# EAGLE board powerSwitch005-pan (EAGLE 5.10)
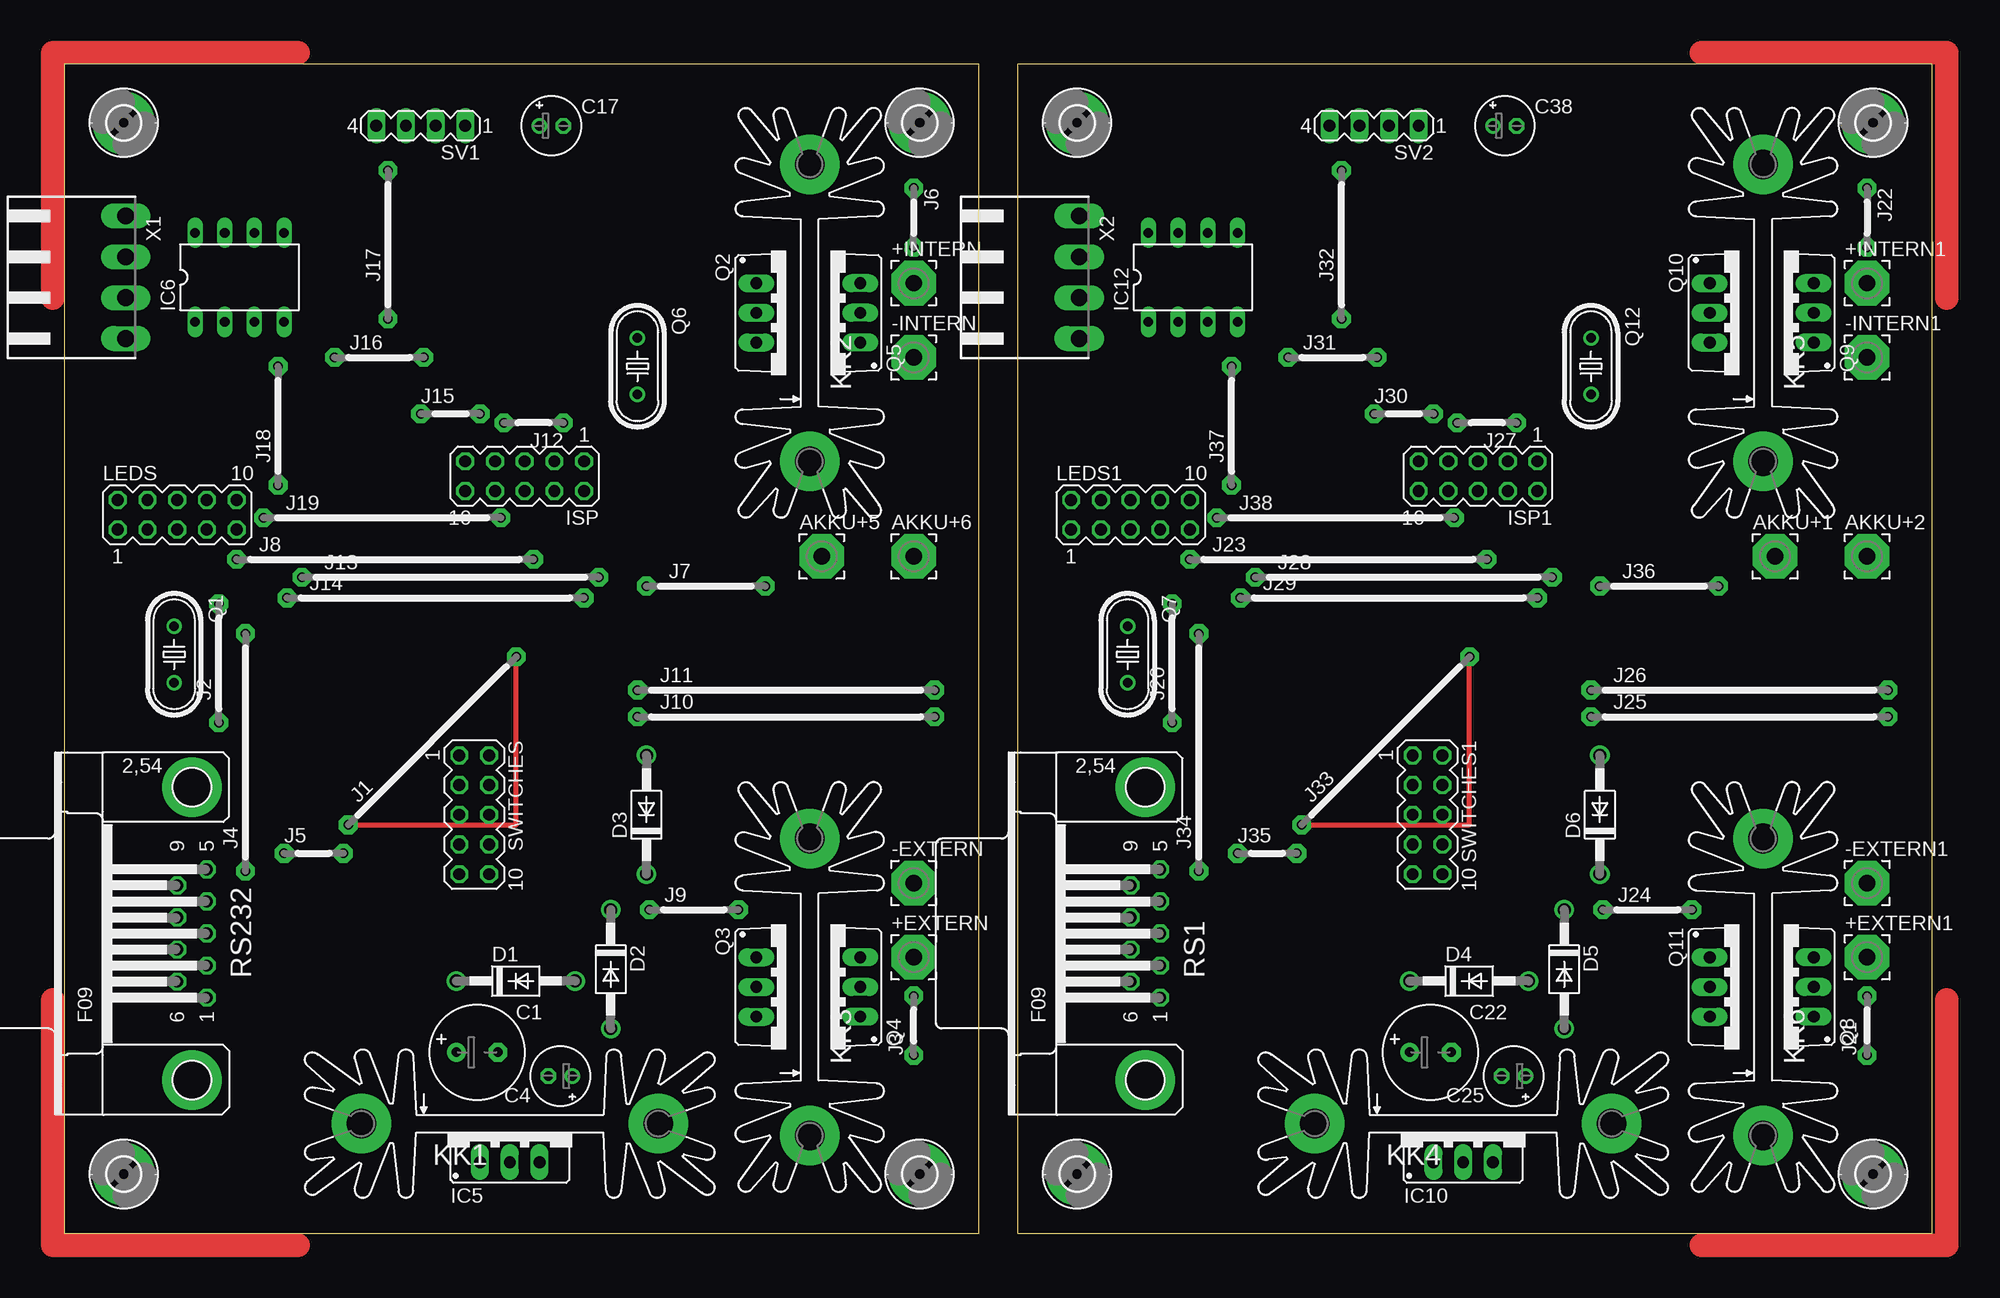
[diagram p0: board, top side]
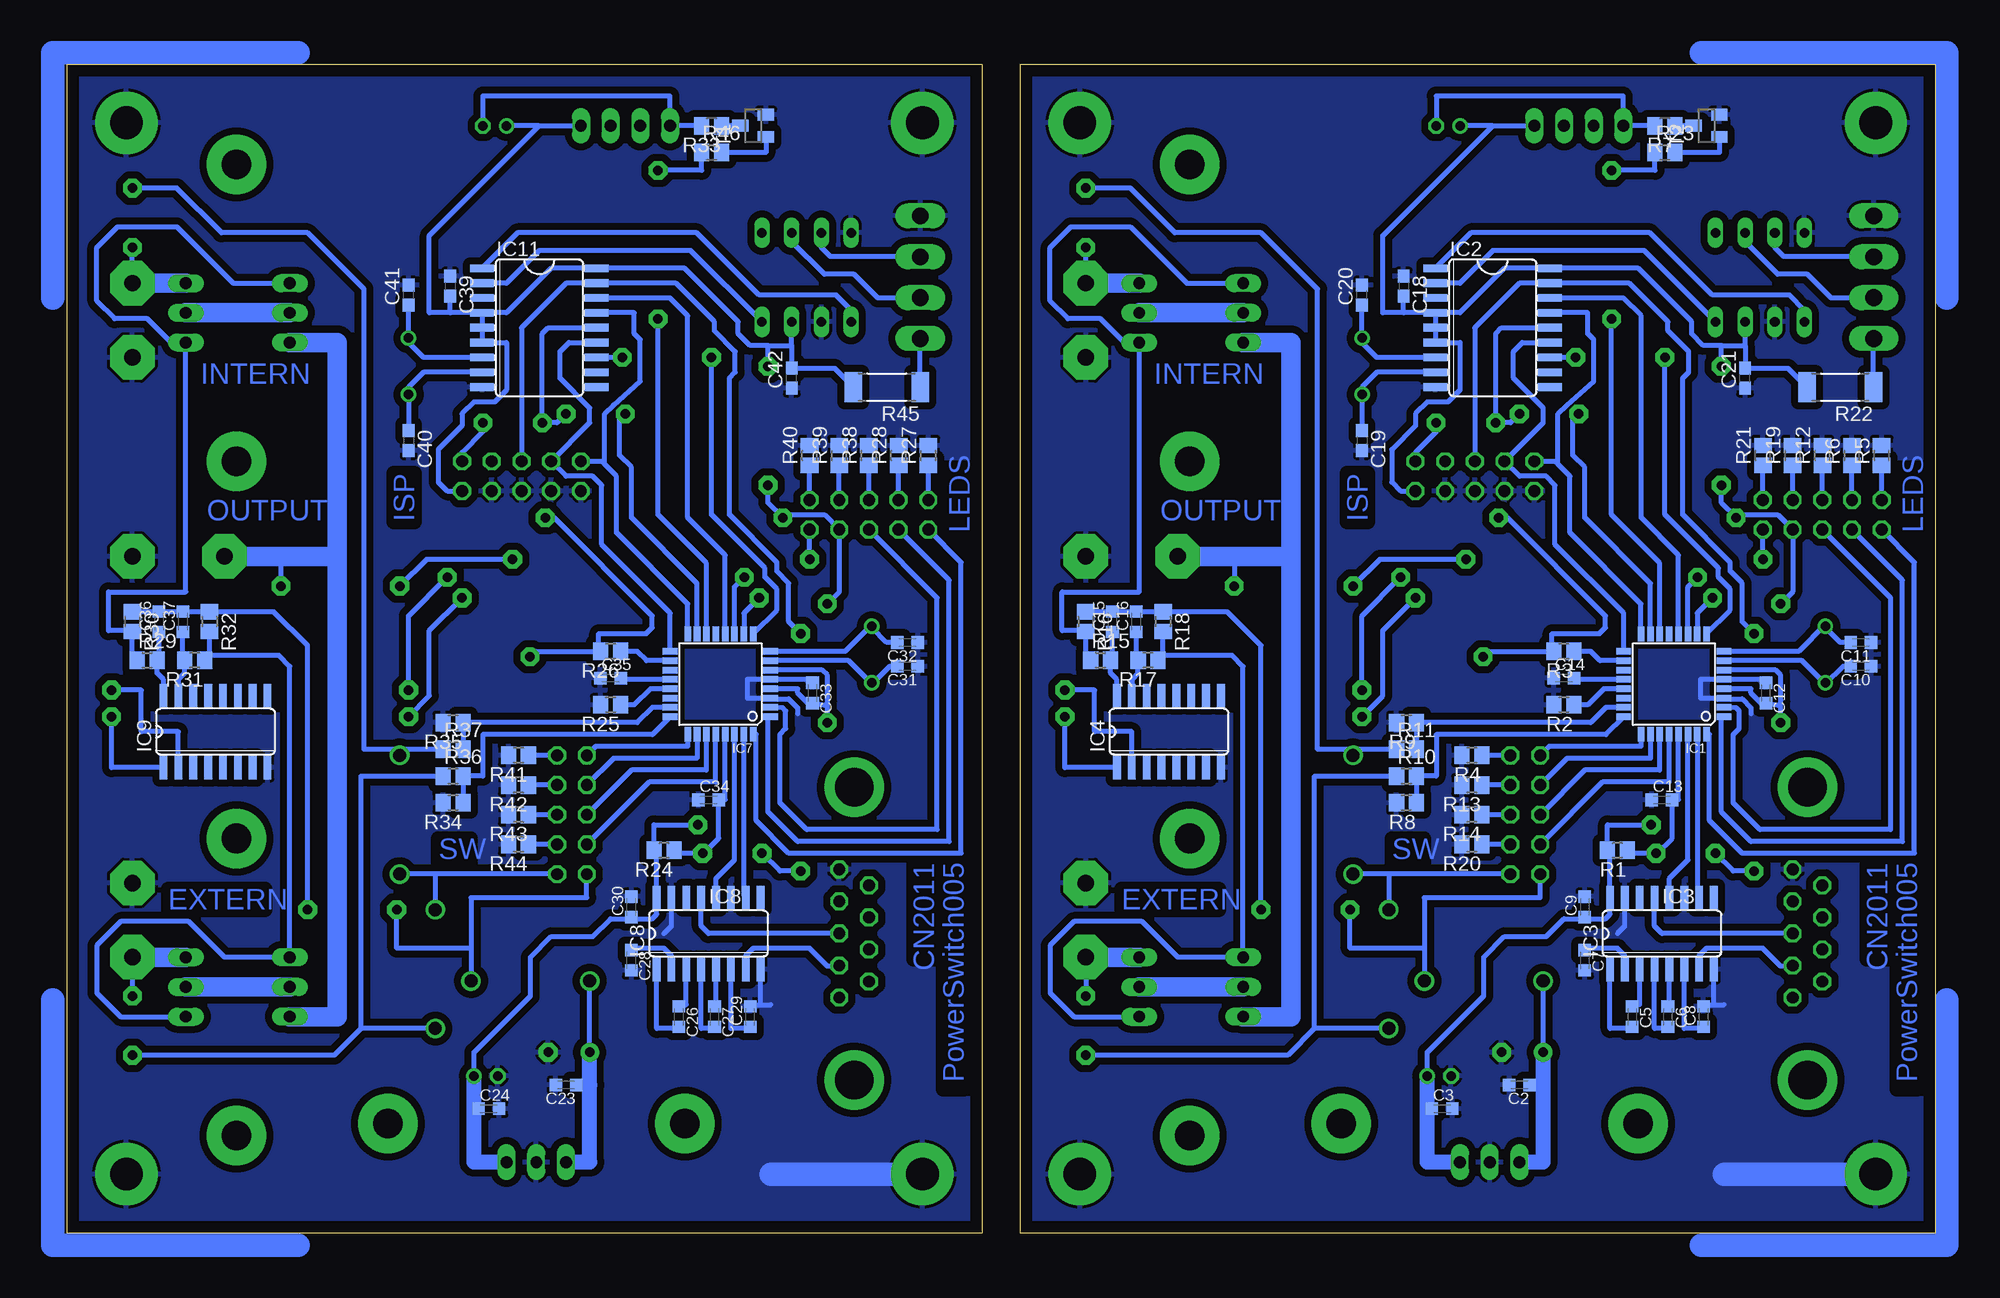
[diagram p1: board, bottom side, seen from below]

Size 159.75 x 100 mm. Coordinates in mm from the lower left corner, seen from the top.
Outline: 0,0 78.21,0 78.21,100 0,100 0,0
Outline: 81.53,0 159.75,0 159.75,100 81.53,100 81.53,0
Copper layers (1*16): Top 0.035mm / dielectric 1.5mm / Bottom 0.035mm
Design rules "olimex_8mils": minimum track width 10mil, minimum drill 24mil, track to track 8mil, track to pad 8mil, pad to pad 8mil, via to via 8mil, smd to smd 8mil, copper to edge 40mil, drill to drill 10mil, minimum pad ring 10mil, minimum via ring 8mil, stop-mask expansion 0mil, vias tented up to drill 0mil, thermal gap 10mil

## Footprints (pad centres in the part's own frame; a part is rotated, then mirrored left to right if it is on the bottom)
3,81/1,4 = drill 1.397 pad 3.81 octagon: 1 0,0
E3,5-8 = drill 0.813 pad 1.6 round: + -1.778,0 | drill 0.813 pad 1.6 octagon: - 1.778,0
C0603K = smd 1.05 x 1.08: 1 -0.875,0; 2 0.875,0
E2-5 = drill 0.813 pad 1.27 round: + -1.016,0 | drill 0.813 pad 1.27 octagon: - 1.016,0
C0603 = smd 1.1 x 1: 1 -0.85,0; 2 0.85,0
DO41-10 = drill 1.118 round: A 5.08,0; C -5.08,0
2,8-PAD = drill 2.8 pad 5.334 round: B2,8 0,0
TQFP32-08 = smd 1.27 x 0.559: 1 -4.293,2.8; 2 -4.293,2; 3 -4.293,1.2; 4 -4.293,0.4; 5 -4.293,-0.4; 6 -4.293,-1.2; 7 -4.293,-2; 8 -4.293,-2.8; 17 4.293,-2.8; 18 4.293,-2; 19 4.293,-1.2; 20 4.293,-0.4; 21 4.293,0.4; 22 4.293,1.2; 23 4.293,2; 24 4.293,2.8 | smd 0.559 x 1.27: 9 -2.8,-4.293; 10 -2,-4.293; 11 -1.2,-4.293; 12 -0.4,-4.293; 13 0.4,-4.293; 14 1.2,-4.293; 15 2,-4.293; 16 2.8,-4.293; 25 2.8,4.293; 26 2,4.293; 27 1.2,4.293; 28 0.4,4.293; 29 -0.4,4.293; 30 -1.2,4.293; 31 -2,4.293; 32 -2.8,4.293
SO18L = smd 0.66 x 2.032: 1 -5.08,-4.902; 2 -3.81,-4.902; 3 -2.54,-4.902; 4 -1.27,-4.902; 5 0,-4.902; 6 1.27,-4.902; 7 2.54,-4.902; 8 3.81,-4.902; 9 5.08,-4.902; 10 5.08,4.902; 11 3.81,4.902; 12 2.54,4.902; 13 1.27,4.902; 14 0,4.902; 15 -1.27,4.902; 16 -2.54,4.902; 17 -3.81,4.902; 18 -5.08,4.902
SO16 = smd 0.66 x 2.032: 1 -4.445,-3.073; 2 -3.175,-3.073; 3 -1.905,-3.073; 4 -0.635,-3.073; 5 0.635,-3.073; 6 1.905,-3.073; 7 3.175,-3.073; 8 4.445,-3.073; 9 4.445,3.073; 10 3.175,3.073; 11 1.905,3.073; 12 0.635,3.073; 13 -0.635,3.073; 14 -1.905,3.073; 15 -3.175,3.073; 16 -4.445,3.073
78XXS = drill 1.016 long: GND 0,-2.54; IN -2.54,-2.54; OUT 2.54,-2.54
DIL08 = drill 0.813 long: 1 -3.81,-3.81; 2 -1.27,-3.81; 3 1.27,-3.81; 4 3.81,-3.81; 5 3.81,3.81; 6 1.27,3.81; 7 -1.27,3.81; 8 -3.81,3.81
MA05-2 = drill 1.016 octagon: 1 -5.08,-1.27; 2 -5.08,1.27; 3 -2.54,-1.27; 4 -2.54,1.27; 5 0,-1.27; 6 0,1.27; 7 2.54,-1.27; 8 2.54,1.27; 9 5.08,-1.27; 10 5.08,1.27
20 = drill 0.813 pad 1.6 octagon: 1 -10.16,0; 2 10.16,0
10 = drill 0.813 pad 1.6 octagon: 1 -5.08,0; 2 5.08,0
05 = drill 0.813 pad 1.6 octagon: 1 -2.54,0; 2 2.54,0
25 = drill 0.813 pad 1.6 octagon: 1 -12.7,0; 2 12.7,0
07 = drill 0.813 pad 1.6 octagon: 1 -3.81,0; 2 3.81,0
12 = drill 0.813 pad 1.6 octagon: 1 -6.35,0; 2 6.35,0
SK104 = drill 2.54 pad 5.08 round: A2,5 -12.7,-0.762; B2,5 12.7,-0.762
HC49U-V = drill 0.813 round: 1 -2.413,0; 2 2.413,0
TO220BV = drill 1.016 long: D 0,-2.54; G -2.54,-2.54; S 2.54,-2.54
R0805 = smd 1.3 x 1.5: 1 -0.85,0; 2 0.85,0
M5923 = smd 1.5 x 2.6: 1 -2.85,0; 2 2.85,0
F09HP = drill 1.016 octagon: 1 -5.486,-1.27; 2 -2.743,-1.27; 3 0,-1.27; 4 2.743,-1.27; 5 5.486,-1.27; 6 -4.115,1.27; 7 -1.372,1.27; 8 1.372,1.27; 9 4.115,1.27 | drill 3.302 pad 5.08 round: G1 -12.522,0; G2 12.522,0
MA04-1 = drill 1.016 long: 1 -3.81,0; 2 -1.27,0; 3 1.27,0; 4 3.81,0
SOT23 = smd 1 x 1.4: 1 -0.95,-1.1; 2 0.95,-1.1; 3 0,1.1
90-4 = drill 1.422 long: 1 -5.25,5.25; 2 -1.75,5.25; 3 1.75,5.25; 4 5.25,5.25

## Placement (x,y rotation side)
+EXTERN  WIREPAD3,81/1,4  [3,81/1,4]  72.64,23.62 0 top
+EXTERN1  WIREPAD3,81/1,4  [3,81/1,4]  154.18,23.62 0 top
+INTERN  WIREPAD3,81/1,4  [3,81/1,4]  72.64,81.28 0 top
+INTERN1  WIREPAD3,81/1,4  [3,81/1,4]  154.18,81.28 0 top
-EXTERN  WIREPAD3,81/1,4  [3,81/1,4]  72.64,29.97 0 top
-EXTERN1  WIREPAD3,81/1,4  [3,81/1,4]  154.18,29.97 0 top
-INTERN  WIREPAD3,81/1,4  [3,81/1,4]  72.64,74.93 0 top
-INTERN1  WIREPAD3,81/1,4  [3,81/1,4]  154.18,74.93 0 top
AKKU+1  WIREPAD3,81/1,4  [3,81/1,4]  146.3,57.91 0 top
AKKU+2  WIREPAD3,81/1,4  [3,81/1,4]  154.18,57.91 0 top
AKKU+5  WIREPAD3,81/1,4  [3,81/1,4]  64.77,57.91 0 top
AKKU+6  WIREPAD3,81/1,4  [3,81/1,4]  72.64,57.91 0 top
C1  220uF/25V  [E3,5-8]  35.31,15.49 0 top
C2  100n  [C0603K]  35.56,12.7 180 bottom
C3  100n  [C0603K]  42.16,10.67 0 bottom
C4  10uF/35V  [E2-5]  42.42,13.46 180 top
C5  100n  [C0603K]  25.91,18.54 270 bottom
C6  100n  [C0603K]  22.86,18.54 270 bottom
C7  100n  [C0603K]  29.97,23.37 270 bottom
C8  100n  [C0603K]  19.81,18.54 90 bottom
C9  100n  [C0603K]  29.97,27.94 90 bottom
C10  22p  [C0603K]  6.35,48.51 180 bottom
C11  22p  [C0603K]  6.35,50.55 180 bottom
C12  100n  [C0603K]  14.48,46.23 270 bottom
C13  100n  [C0603K]  23.37,37.08 0 bottom
C14  100n  [C0603K]  31.75,47.5 0 bottom
C15  100n  [C0603K]  70.36,52.32 90 bottom
C16  100n  [C0603K]  68.33,52.32 90 bottom
C17  1uF/35V  [E2-5]  41.66,94.74 0 top
C18  100n  [C0603]  45.47,81.03 270 bottom
C19  22p  [C0603]  49.02,67.82 270 bottom
C20  22p  [C0603]  49.02,80.26 90 bottom
C21  100n  [C0603]  16.26,73.15 90 bottom
C22  220uF/25V  [E3,5-8]  116.84,15.49 0 top
C23  100n  [C0603K]  117.09,12.7 180 bottom
C24  100n  [C0603K]  123.7,10.67 0 bottom
C25  10uF/35V  [E2-5]  123.95,13.46 180 top
C26  100n  [C0603K]  107.44,18.54 270 bottom
C27  100n  [C0603K]  104.39,18.54 270 bottom
C28  100n  [C0603K]  111.51,23.37 270 bottom
C29  100n  [C0603K]  101.35,18.54 90 bottom
C30  100n  [C0603K]  111.51,27.94 90 bottom
C31  22p  [C0603K]  87.88,48.51 180 bottom
C32  22p  [C0603K]  87.88,50.55 180 bottom
C33  100n  [C0603K]  96.01,46.23 270 bottom
C34  100n  [C0603K]  104.9,37.08 0 bottom
C35  100n  [C0603K]  113.28,47.5 0 bottom
C36  100n  [C0603K]  151.89,52.32 90 bottom
C37  100n  [C0603K]  149.86,52.32 90 bottom
C38  1uF/35V  [E2-5]  123.19,94.74 0 top
C39  100n  [C0603]  127,81.03 270 bottom
C40  22p  [C0603]  130.56,67.82 270 bottom
C41  22p  [C0603]  130.56,80.26 90 bottom
C42  100n  [C0603]  97.79,73.15 90 bottom
D1  1N4001  [DO41-10]  38.61,21.59 0 top
D2  1N4001  [DO41-10]  46.74,22.61 270 top
D3  1N4001  [DO41-10]  49.78,35.81 90 top
D4  1N4001  [DO41-10]  120.14,21.59 0 top
D5  1N4001  [DO41-10]  128.27,22.61 270 top
D6  1N4001  [DO41-10]  131.32,35.81 90 top
H1  MOUNT-PAD-ROUND2.8  [2,8-PAD]  73.15,5.08 90 top
H2  MOUNT-PAD-ROUND2.8  [2,8-PAD]  5.08,5.08 90 top
H3  MOUNT-PAD-ROUND2.8  [2,8-PAD]  5.08,95 90 top
H4  MOUNT-PAD-ROUND2.8  [2,8-PAD]  73.15,95 90 top
H5  MOUNT-PAD-ROUND2.8  [2,8-PAD]  154.69,5.08 90 top
H6  MOUNT-PAD-ROUND2.8  [2,8-PAD]  86.61,5.08 90 top
H7  MOUNT-PAD-ROUND2.8  [2,8-PAD]  86.61,95 90 top
H8  MOUNT-PAD-ROUND2.8  [2,8-PAD]  154.69,95 90 top
IC1  MEGA168  [TQFP32-08]  22.35,46.99 180 bottom
IC2  MCP2515-E/SO  [SO18L]  37.85,77.47 270 bottom
IC3  MAX202  [SO16]  23.37,25.65 0 bottom
IC4  ULN2003AD  [SO16]  65.53,42.93 0 bottom
IC5  78S05  [78XXS]  38.1,8.64 0 top
IC6  PCA82C250  [DIL08]  14.99,81.79 0 top
IC7  MEGA168  [TQFP32-08]  103.89,46.99 180 bottom
IC8  MAX202  [SO16]  104.9,25.65 0 bottom
IC9  ULN2003AD  [SO16]  147.07,42.93 0 bottom
IC10  78S05  [78XXS]  119.63,8.64 0 top
IC11  MCP2515-E/SO  [SO18L]  119.38,77.47 270 bottom
IC12  PCA82C250  [DIL08]  96.52,81.79 0 top
ISP  socket  [MA05-2]  39.37,64.77 180 top
ISP1  socket  [MA05-2]  120.9,64.77 180 top
J1  J20MM  [20]  31.47,42.13 45 top
J2  J10MM  [10]  13.21,48.77 90 top
J3  J5MM  [05]  72.64,17.78 90 top
J4  J20MM  [20]  15.49,41.15 90 top
J5  J5MM  [05]  21.34,32.51 0 top
J6  J5MM  [05]  72.64,86.87 270 top
J7  J10MM  [10]  54.86,55.37 0 top
J8  J25MM  [25]  27.43,57.66 0 top
J9  J7MM  [07]  53.85,27.69 0 top
J10  J25MM  [25]  61.72,44.2 0 top
J11  J25MM  [25]  61.72,46.48 0 top
J12  J5MM  [05]  40.13,69.34 180 top
J13  J25MM  [25]  33.02,56.13 0 top
J14  J25MM  [25]  31.75,54.36 0 top
J15  J5MM  [05]  33.02,70.1 0 top
J16  J7MM  [07]  26.92,74.93 0 top
J17  J12MM  [12]  27.69,84.58 90 top
J18  J10MM  [10]  18.29,69.09 90 top
J19  J20MM  [20]  27.18,61.21 0 top
J20  J10MM  [10]  94.74,48.77 90 top
J21  J5MM  [05]  154.18,17.78 90 top
J22  J5MM  [05]  154.18,86.87 270 top
J23  J25MM  [25]  108.97,57.66 0 top
J24  J7MM  [07]  135.38,27.69 0 top
J25  J25MM  [25]  143.26,44.2 0 top
J26  J25MM  [25]  143.26,46.48 0 top
J27  J5MM  [05]  121.67,69.34 180 top
J28  J25MM  [25]  114.55,56.13 0 top
J29  J25MM  [25]  113.28,54.36 0 top
J30  J5MM  [05]  114.55,70.1 0 top
J31  J7MM  [07]  108.46,74.93 0 top
J32  J12MM  [12]  109.22,84.58 90 top
J33  J20MM  [20]  113,42.13 45 top
J34  J20MM  [20]  97.03,41.15 90 top
J35  J5MM  [05]  102.87,32.51 0 top
J36  J10MM  [10]  136.4,55.37 0 top
J37  J10MM  [10]  99.82,69.09 90 top
J38  J20MM  [20]  108.71,61.21 0 top
KK1  SK104  [SK104]  38.1,10.16 0 top
KK2  SK104  [SK104]  62.99,78.74 90 top
KK3  SK104  [SK104]  62.99,21.08 90 top
KK4  SK104  [SK104]  119.63,10.16 0 top
KK5  SK104  [SK104]  144.53,78.74 90 top
KK6  SK104  [SK104]  144.53,21.08 90 top
LEDS  leds  [MA05-2]  9.65,61.47 0 top
LEDS1  leds  [MA05-2]  91.19,61.47 0 top
Q1  20Mhz  [HC49U-V]  9.4,49.53 270 top
Q2  irf4905  [TO220BV]  61.72,78.74 270 top
Q3  irf4905  [TO220BV]  61.72,21.08 270 top
Q4  irf4905  [TO220BV]  65.53,21.08 90 top
Q5  irf4905  [TO220BV]  65.53,78.74 90 top
Q6  16MHz  [HC49U-V]  49.02,74.17 270 top
Q7  20Mhz  [HC49U-V]  90.93,49.53 270 top
Q8  irf4905  [TO220BV]  147.07,21.08 90 top
Q9  irf4905  [TO220BV]  147.07,78.74 90 top
Q10  irf4905  [TO220BV]  143.26,78.74 270 top
Q11  irf4905  [TO220BV]  143.26,21.08 270 top
Q12  16MHz  [HC49U-V]  130.56,74.17 270 top
R1  10k  [R0805]  27.18,32.77 180 bottom
R2  0  [R0805]  31.75,45.21 180 bottom
R3  0  [R0805]  31.75,49.78 180 bottom
R4  560  [R0805]  39.62,40.89 180 bottom
R5  560  [R0805]  4.57,66.55 90 bottom
R6  560  [R0805]  7.11,66.55 90 bottom
R7  560  [R0805]  23.11,94.74 180 bottom
R8  47k  [R0805]  45.21,36.83 180 bottom
R9  47k  [R0805]  45.21,43.69 180 bottom
R10  47k  [R0805]  45.21,39.12 0 bottom
R11  47k  [R0805]  45.21,41.4 0 bottom
R12  560  [R0805]  9.65,66.55 90 bottom
R13  560  [R0805]  39.62,38.35 180 bottom
R14  560  [R0805]  39.62,35.81 180 bottom
R15  100  [R0805]  71.37,49.02 0 bottom
R16  10k  [R0805]  72.64,52.32 270 bottom
R17  100  [R0805]  67.31,49.02 180 bottom
R18  10k  [R0805]  66.04,52.32 270 bottom
R19  560  [R0805]  12.19,66.55 90 bottom
R20  560  [R0805]  39.62,33.27 180 bottom
R21  560  [R0805]  14.73,66.55 90 bottom
R22  0  [M5923]  8.13,72.39 180 bottom
R23  4k7  [R0805]  23.11,92.46 0 bottom
R24  10k  [R0805]  108.71,32.77 180 bottom
R25  0  [R0805]  113.28,45.21 180 bottom
R26  0  [R0805]  113.28,49.78 180 bottom
R27  560  [R0805]  86.11,66.55 90 bottom
R28  560  [R0805]  88.65,66.55 90 bottom
R29  100  [R0805]  152.91,49.02 0 bottom
R30  10k  [R0805]  154.18,52.32 270 bottom
R31  100  [R0805]  148.84,49.02 180 bottom
R32  10k  [R0805]  147.57,52.32 270 bottom
R33  560  [R0805]  104.65,94.74 180 bottom
R34  47k  [R0805]  126.75,36.83 180 bottom
R35  47k  [R0805]  126.75,43.69 180 bottom
R36  47k  [R0805]  126.75,39.12 0 bottom
R37  47k  [R0805]  126.75,41.4 0 bottom
R38  560  [R0805]  91.19,66.55 90 bottom
R39  560  [R0805]  93.73,66.55 90 bottom
R40  560  [R0805]  96.27,66.55 90 bottom
R41  560  [R0805]  121.16,40.89 180 bottom
R42  560  [R0805]  121.16,38.35 180 bottom
R43  560  [R0805]  121.16,35.81 180 bottom
R44  560  [R0805]  121.16,33.27 180 bottom
R45  0  [M5923]  89.66,72.39 180 bottom
R46  4k7  [R0805]  104.65,92.46 0 bottom
RS1  socket  [F09HP]  92.46,25.65 90 top
RS232  socket  [F09HP]  10.92,25.65 90 top
SV1  speaker  [MA04-1]  30.48,94.74 180 top
SV2  speaker  [MA04-1]  112.01,94.74 180 top
SWITCHES  switches  [MA05-2]  35.05,35.81 270 top
SWITCHES1  switches  [MA05-2]  116.59,35.81 270 top
T1  BC847  [SOT23]  101.09,94.74 90 bottom
T2  BC847  [SOT23]  19.56,94.74 90 bottom
X1  can  [90-4]  0,81.79 270 top
X2  can  [90-4]  81.53,81.79 270 top

## Library data of the parts
+EXTERN +EXTERN1 +INTERN +INTERN1 -EXTERN -EXTERN1 -INTERN -INTERN1 AKKU+1 AKKU+2 AKKU+5 AKKU+6 = wirepad
C1-C42 R1-R46 = rcl
D1-D6 = diode
H1-H8 = holes
IC1 IC7 = atmel
IC2 IC11 = mcp2515
IC3 IC8 = maxim
IC4 IC9 = uln-udn
IC5 IC10 = v-reg
IC6 IC12 = micro-philips
ISP ISP1 LEDS LEDS1 SV1 SV2 SWITCHES SWITCHES1 = con-lstb
J1-J38 = jumper
KK1-KK6 = heatsink
Q1 Q6 Q7 Q12 = crystal
Q2-Q5 Q8-Q11 = transistor-power
RS1 RS232 = con-subd
T1 T2 = transistor
X1 X2 = con-weidmueller-sl35

## Nets
+5V: C3.1 C4.+ C9.1 C12.2 C17.+ C18.2 C21.2 IC1.4 IC1.6 IC2.4 IC2.5 IC2.6 IC2.18 IC3.16 IC5.OUT IC6.3 ISP.2 J1.1 J1.2 J2.1 J2.2 J18.1 J18.2 J19.1 J19.2 LEDS.7 R1.2 R3.2 R22.2 SV1.1
+5V1: C24.1 C25.+ C30.1 C33.2 C38.+ C39.2 C42.2 IC7.4 IC7.6 IC8.16 IC10.OUT IC11.4 IC11.5 IC11.6 IC11.18 IC12.3 ISP1.2 J20.1 J20.2 J33.1 J33.2 J37.1 J37.2 J38.1 J38.2 LEDS1.7 R24.2 R26.2 R45.2 SV2.1
AKKU+: D1.A J9.1 SWITCHES.9
AKKU+1: D4.A J24.1 SWITCHES1.9
AKKU+2: C15.2 C16.2 J9.2 R16.1 R18.1
AKKU+3: C36.2 C37.2 J24.2 R30.1 R32.1
BLUB: C1.+ C2.1 D1.C IC5.IN
BLUB1: C22.+ C23.1 D4.C IC10.IN
GND: -EXTERN.1 -INTERN.1 AKKU+6.1 C1.- C2.2 C3.2 C4.- C7.2 C8.2 C9.2 C10.1 C11.1 C12.1 C13.1 C14.1 C18.1 C19.2 C20.2 C21.1 H1.B2,8 H2.B2,8 H3.B2,8 H4.B2,8 IC1.3 IC1.5 IC2.9 IC3.8 IC3.11 IC3.15 IC4.8 IC5.GND IC6.2 IC6.8 ISP.4 ISP.6 ISP.8 ISP.10 R2.2 R4.2 R5.2 R6.2 R8.2 R9.2 R12.2 R13.2 R14.2 R19.2 R20.2 R21.2 RS232.5 T2.2 X1.1
GND1: -EXTERN1.1 -INTERN1.1 AKKU+2.1 C22.- C23.2 C24.2 C25.- C28.2 C29.2 C30.2 C31.1 C32.1 C33.1 C34.1 C35.1 C39.1 C40.2 C41.2 C42.1 H5.B2,8 H6.B2,8 H7.B2,8 H8.B2,8 IC7.3 IC7.5 IC8.8 IC8.11 IC8.15 IC9.8 IC10.GND IC11.9 IC12.2 IC12.8 ISP1.4 ISP1.6 ISP1.8 ISP1.10 R25.2 R27.2 R28.2 R34.2 R35.2 R38.2 R39.2 R40.2 R41.2 R42.2 R43.2 R44.2 RS1.5 T1.2 X2.1
INT: IC1.9 J16.1
INT1: IC7.9 J31.1
MISO: IC1.16 IC2.15 ISP.9
MISO1: IC7.16 IC11.15 ISP1.9
MOSI: IC2.14 J12.2 J15.2
MOSI1: IC11.14 J27.2 J30.2
N$1: IC1.14 J17.1
N$2: IC3.13 RS232.3
N$3: IC3.7 RS232.2
N$4: C5.2 IC3.1
N$5: C6.2 IC3.4
N$6: C5.1 IC3.3
N$7: C6.1 IC3.5
N$8: C7.1 IC3.2
N$9: C8.1 IC3.6
N$10: C10.2 IC1.7 Q1.2
N$11: C11.2 IC1.8 Q1.1
N$12: Q3.D Q4.D
N$13: C14.2 IC1.20
N$14: IC1.18 R3.1
N$15: IC1.21 R2.1
N$16: Q2.D Q5.D
N$17: +INTERN.1 J6.2 Q5.S
N$18: R7.1 T2.3
N$19: R13.1 SWITCHES.4
N$20: AKKU+5.1 J7.2 Q2.S Q3.S
N$21: IC1.23 R9.1 R11.2
N$22: +EXTERN.1 J3.2 Q4.S
N$24: J8.1 LEDS.9
N$31: R4.1 SWITCHES.2
N$32: IC1.10 J14.1
N$33: IC1.11 J13.1
N$34: IC1.2 LEDS.5
N$35: IC1.1 LEDS.3
N$36: R14.1 SWITCHES.6
N$37: IC2.1 IC6.1
N$38: IC2.2 IC6.4
N$40: IC1.32 LEDS.1
N$41: LEDS.4 R6.1
N$42: C15.1 IC4.16 R15.2
N$43: Q2.G Q5.G R15.1 R16.2
N$44: LEDS.6 R12.1
N$45: C16.1 IC4.15 R17.2
N$46: Q3.G Q4.G R17.1 R18.2
N$47: R20.1 SWITCHES.8
N$48: C19.1 IC2.8 Q6.2
N$49: C20.1 IC2.7 Q6.1
N$50: IC6.7 X1.2
N$51: IC6.6 X1.3
N$52: LEDS.2 R5.1
N$53: LEDS.8 R19.1
N$54: LEDS.10 R21.1
N$55: IC1.25 SWITCHES.1
N$56: IC1.26 SWITCHES.3
N$57: D2.A J3.1 R10.1
N$58: C17.- R7.2 SV1.4
N$59: IC1.27 SWITCHES.5
N$60: IC1.28 SWITCHES.7
N$61: R22.1 X1.4
N$62: R23.2 T2.1
N$63: D2.C D3.C SWITCHES.10
N$64: D3.A J6.1 R11.1
N$65: IC4.1 J10.2
N$66: IC1.24 R8.1 R10.2
N$67: IC4.2 J11.2
N$68: ISP.1 J12.1
N$69: J11.1 J13.2
N$70: J10.1 J14.2
N$71: IC1.15 J15.1
N$72: IC2.12 J16.2
N$73: J17.2 R23.1
N$74: C13.2 IC1.29 J5.2 R1.1
N$75: J4.1 J5.1
N$76: J7.1 J8.2
N$77: C26.2 IC8.1
N$78: C27.2 IC8.4
N$79: C26.1 IC8.3
N$80: C27.1 IC8.5
N$81: C28.1 IC8.2
N$82: C29.1 IC8.6
N$83: IC8.13 RS1.3
N$84: IC8.7 RS1.2
N$85: C31.2 IC7.7 Q7.2
N$86: C32.2 IC7.8 Q7.1
N$87: C35.2 IC7.20
N$88: IC7.21 R25.1
N$89: IC7.18 R26.1
N$90: +INTERN1.1 J22.2 Q9.S
N$91: +EXTERN1.1 J21.2 Q8.S
N$100: C36.1 IC9.16 R29.2
N$101: Q9.G Q10.G R29.1 R30.2
N$102: C37.1 IC9.15 R31.2
N$103: Q8.G Q11.G R31.1 R32.2
N$104: IC7.23 R35.1 R37.2
N$105: AKKU+1.1 J36.2 Q10.S Q11.S
N$106: IC7.14 J32.1
N$107: IC11.1 IC12.1
N$108: IC11.2 IC12.4
N$109: C40.1 IC11.8 Q12.2
N$110: C41.1 IC11.7 Q12.1
N$111: IC12.7 X2.2
N$112: IC12.6 X2.3
N$113: IC7.10 J29.1
N$114: IC7.11 J28.1
N$115: IC7.2 LEDS1.5
N$116: IC7.1 LEDS1.3
N$117: IC7.32 LEDS1.1
N$118: LEDS1.4 R28.1
N$119: LEDS1.2 R27.1
N$120: LEDS1.6 R38.1
N$121: LEDS1.8 R39.1
N$122: LEDS1.10 R40.1
N$123: R42.1 SWITCHES1.4
N$124: R41.1 SWITCHES1.2
N$125: R43.1 SWITCHES1.6
N$126: R44.1 SWITCHES1.8
N$127: IC7.25 SWITCHES1.1
N$128: IC7.26 SWITCHES1.3
N$129: IC7.27 SWITCHES1.5
N$130: IC7.28 SWITCHES1.7
N$131: R45.1 X2.4
N$132: R46.2 T1.1
N$133: C38.- R33.2 SV2.4
N$134: Q9.D Q10.D
N$135: Q8.D Q11.D
N$136: R33.1 T1.3
N$137: D5.C D6.C SWITCHES1.10
N$138: D5.A J21.1 R36.1
N$139: D6.A J22.1 R37.1
N$140: IC7.24 R34.1 R36.2
N$141: J23.1 LEDS1.9
N$142: IC9.1 J25.2
N$143: IC9.2 J26.2
N$144: J26.1 J28.2
N$145: J25.1 J29.2
N$146: ISP1.1 J27.1
N$147: IC7.15 J30.1
N$148: IC11.12 J31.2
N$149: J32.2 R46.1
N$150: C34.2 IC7.29 J35.2 R24.1
N$151: J34.1 J35.1
N$152: J23.2 J36.1
RST: IC2.17 ISP.5 J4.2
RST1: IC11.17 ISP1.5 J34.2
RXD: IC1.30 IC3.12
RXD1: IC7.30 IC8.12
SCK: IC1.17 IC2.13 ISP.7
SCK1: IC7.17 IC11.13 ISP1.7
SS: IC1.12 IC2.16
SS1: IC7.12 IC11.16
TXD: IC1.31 IC3.10
TXD1: IC7.31 IC8.10

## Tracks (layer width: path | path; a pad name or v marks a point on that pad's centre or on a via)
+5V
  Top 0.406: J1.1 38.65,34.95 J1.2 | J2.2 J2.1 | J19.2 J19.1 | J18.1 J18.2
  Bottom 0.406: IC1.4 15.75,46.59 15.75,46.23 14.73,45.21 C12.2 | IC1.6 13.65,48.19 13.21,47.75 13.21,45.72 | C12.2 13.32,45.1 13.21,45.72 | C12.2 14.48,45.21 | J2.1 13.21,45.72 | J2.2 12.19,54.86 LEDS.7 13.46,61.47 16.51,61.47 16.76,61.21 J19.1 18.29,62.48 J18.1 | IC2.4 40.64,78.74 36.83,82.55 IC2.18 25.4,82.55 20.83,77.98 20.83,76.96 19.81,75.95 18.29,75.95 | 18.29,75.95 16.26,75.95 | 16.26,75.95 IC6.3 | 16.26,75.95 C21.2 12.59,74 R22.2 | IC2.4 IC2.5 IC2.6 40.64,76.2 40.64,72.14 41.66,71.12 43.43,71.12 44.45,70.1 44.45,69.09 46.48,67.06 46.48,64.26 45.72,63.5 ISP.2 | IC2.4 45.47,78.74 | 45.47,78.74 47.24,78.74 47.24,85.34 37.85,94.74 | 37.85,94.74 SV1.1 | 37.85,94.74 C17.+ | 45.47,78.74 C18.2 | J1.2 38.18,49.78 R3.2 32.77,49.95 32.77,51.31 28.7,51.31 28.19,51.82 28.19,52.83 36.58,61.21 J19.2 | J1.1 28.03,34.95 R1.2 27.81,32.77 IC3.16 27.81,27.3 28.19,26.92 29.97,26.92 C9.1 30.23,26.92 31.75,26.92 33.27,25.4 36.83,25.4 38.61,23.62 38.61,20.32 43.43,15.49 C4.+ | J18.2 18.29,75.95 | C3.1 43.18,10.67 43.43,10.92
  Bottom 1.27: C4.+ 43.43,10.92 43.43,6.1 IC5.OUT
+5V1
  Top 0.406: J33.1 120.18,34.95 J33.2 | J20.2 J20.1 | J38.2 J38.1 | J37.1 J37.2
  Bottom 0.406: IC7.4 97.28,46.59 97.28,46.23 96.27,45.21 C33.2 | IC7.6 95.18,48.19 94.74,47.75 94.74,45.72 | C33.2 94.86,45.1 94.74,45.72 | C33.2 96.01,45.21 | J20.1 94.74,45.72 | J20.2 93.73,54.86 LEDS1.7 95,61.47 98.04,61.47 98.3,61.21 J38.1 99.82,62.48 J37.1 | IC11.4 122.17,78.74 118.36,82.55 IC11.18 106.93,82.55 102.36,77.98 102.36,76.96 101.35,75.95 99.82,75.95 | 99.82,75.95 97.79,75.95 | 97.79,75.95 IC12.3 | 97.79,75.95 C42.2 94.12,74 R45.2 | IC11.4 IC11.5 IC11.6 122.17,76.2 122.17,72.14 123.19,71.12 124.97,71.12 125.98,70.1 125.98,69.09 128.02,67.06 128.02,64.26 127.25,63.5 ISP1.2 | IC11.4 127,78.74 | 127,78.74 128.78,78.74 128.78,85.34 119.38,94.74 | 119.38,94.74 SV2.1 | 119.38,94.74 C38.+ | 127,78.74 C39.2 | J33.2 119.72,49.78 R26.2 114.3,49.95 114.3,51.31 110.24,51.31 109.73,51.82 109.73,52.83 118.11,61.21 J38.2 | J33.1 109.56,34.95 R24.2 109.35,32.77 IC8.16 109.35,27.3 109.73,26.92 111.51,26.92 C30.1 111.76,26.92 113.28,26.92 114.81,25.4 118.36,25.4 120.14,23.62 120.14,20.32 124.97,15.49 C25.+ | J37.2 99.82,75.95 | C24.1 124.71,10.67 124.97,10.92
  Bottom 1.27: C25.+ 124.97,10.92 124.97,6.1 IC10.OUT
AKKU+
  Bottom 0.406: 43.69,24.38 D1.A | SWITCHES.9 33.78,28.7 43.69,28.7 43.69,24.38 | 43.69,24.38 50.04,24.38 J9.1
AKKU+1
  Bottom 0.406: 125.22,24.38 D4.A | SWITCHES1.9 115.32,28.7 125.22,28.7 125.22,24.38 | 125.22,24.38 131.57,24.38 J24.1
AKKU+2
  Bottom 0.406: 68.33,53.17 R18.1 60.54,53.17 57.66,50.29 J9.2 | 68.33,53.17 70.61,53.17 | 70.61,53.17 R16.1 | 68.33,53.17 C16.2 | C15.2 70.59,53.2 70.61,53.17
AKKU+3
  Bottom 0.406: 149.86,53.17 R32.1 142.07,53.17 139.19,50.29 J24.2 | 149.86,53.17 152.15,53.17 | 152.15,53.17 R30.1 | 149.86,53.17 C37.2 | C36.2 152.12,53.2 152.15,53.17
BLUB
  Bottom 0.406: 33.53,12.7 C2.1 | C1.+ D1.C
  Bottom 1.27: C1.+ 33.53,12.7 33.53,6.1 IC5.IN
BLUB1
  Bottom 0.406: 115.06,12.7 C23.1 | C22.+ D4.C
  Bottom 1.27: C22.+ 115.06,12.7 115.06,6.1 IC10.IN
GND
  Bottom 0.406: IC3.15 26.54,26.29 27.18,25.65 | C8.2 19.81,19.56 18.92,19.56 | 18.92,19.56 IC3.8 | 18.92,19.56 18.03,19.56 | 15.75,44.45 15.75,44.96 16.51,45.72 18.03,45.72 18.06,45.74 IC1.3 20.07,45.79 20.07,47.39 IC1.5 14.48,47.39 C12.1
  Bottom 2: 4.83,5.08 H2.B2,8 18.03,5.08
  pour Bottom (isolate 0.61): -0.25,100.33 78.49,100.33 78.49,-0.25 -0.25,-0.25
GND1
  Bottom 0.406: IC8.15 108.08,26.29 108.71,25.65 | C29.2 101.35,19.56 100.46,19.56 | 100.46,19.56 IC8.8 | 100.46,19.56 99.57,19.56 | 97.28,44.45 97.28,44.96 98.04,45.72 99.57,45.72 99.59,45.74 IC7.3 101.6,45.79 101.6,47.39 IC7.5 96.01,47.39 C33.1
  Bottom 2: 86.36,5.08 H6.B2,8 99.57,5.08
  pour Bottom (isolate 0.61): 81.28,100.33 160.02,100.33 160.02,-0.25 81.28,-0.25
INT
  Bottom 0.406: IC1.9 19.55,51.31 17.53,53.34 17.53,55.12 18.54,56.13 18.54,56.9 23.11,61.47 J16.1
INT1
  Bottom 0.406: IC7.9 101.09,51.31 99.06,53.34 99.06,55.12 100.08,56.13 100.08,56.9 104.65,61.47 J31.1
MISO
  Bottom 0.406: IC2.15 29.72,78.74 29.72,76.96 29.21,76.45 29.21,72.9 31.5,70.87 32.26,70.1 32.26,65.79 | IC1.16 25.15,53.85 31.24,59.94 31.24,64.77 32.26,65.79 | 32.26,65.79 32.51,66.04 ISP.9
MISO1
  Bottom 0.406: IC11.15 111.25,78.74 111.25,76.96 110.74,76.45 110.74,72.9 113.03,70.87 113.79,70.1 113.79,65.79 | IC7.16 106.69,53.85 112.78,59.94 112.78,64.77 113.79,65.79 | 113.79,65.79 114.05,66.04 ISP1.9
MOSI
  Bottom 0.406: IC2.14 37.08,77.47 37.59,76.96 J12.2 36.32,69.34 J15.2
MOSI1
  Bottom 0.406: IC11.14 118.62,77.47 119.13,76.96 J27.2 117.86,69.34 J30.2
N$1
  Bottom 0.406: IC1.14 23.55,57.33 27.69,61.47 J17.1
N$2
  Bottom 0.406: IC3.13 24,26.29 23.37,25.65 RS232.3
N$3
  Bottom 0.406: 20.19,22.48 IC3.7 20.19,23.75 19.56,24.38 14.73,24.38 13.21,22.86 12.19,22.86
  Bottom 0.61: RS232.2 12.19,22.86
N$4
  Bottom 0.406: C5.2 26.42,17.53 27.81,17.53 IC3.1
N$5
  Bottom 0.406: C6.2 23.11,17.53 24,17.53 IC3.4
N$6
  Bottom 0.406: C5.1 25.91,19.56 25.27,19.56 IC3.3
N$7
  Bottom 0.406: C6.1 23.11,19.56 22.73,19.56 IC3.5
N$8
  Bottom 0.406: IC3.2 26.54,23.75 27.18,24.38 29.72,24.38 C7.1
N$9
  Bottom 0.406: C8.1 19.81,17.53 21.46,17.53 IC3.6
N$10
  Bottom 0.406: IC1.7 11.4,48.99 9.4,46.99 | 9.4,46.99 Q1.2 | C10.2 7.87,48.51 9.4,46.99
N$11
  Bottom 0.406: IC1.8 11.68,49.79 9.4,52.07 Q1.1 9.4,51.82 8.13,50.55 C11.2
N$12
  Bottom 1.676: Q3.D Q4.D
N$13
  Bottom 0.406: C14.2 30.99,47.5 30.88,47.39 IC1.20
N$14
  Bottom 0.406: IC1.18 28.67,48.99 29.46,49.78 R3.1 30.99,49.78
N$15
  Bottom 0.406: IC1.21 28.34,46.59 29.72,45.21 R2.1
N$16
  Bottom 1.676: Q2.D Q5.D
N$17
  Bottom 0.406: +INTERN.1 J6.2
  Bottom 1.676: Q5.S +INTERN.1
N$18
  Bottom 0.406: T2.3 R7.1
N$19
  Bottom 0.406: SWITCHES.4 R13.1
N$20
  Bottom 0.406: J7.2 59.94,57.91 59.69,57.91
  Bottom 1.676: Q3.S 55.12,18.54 55.12,57.91 | 55.12,57.91 55.12,76.2 Q2.S | 55.12,57.91 59.69,57.91 AKKU+5.1
N$21
  Bottom 0.406: IC1.23 28.16,44.99 29.46,43.69 R9.1 R11.2
N$22
  Bottom 0.406: +EXTERN.1 J3.2
  Bottom 1.676: Q4.S +EXTERN.1
N$23
  Top 2: 20,-1 -1,-1 -1,20
N$24
  Bottom 0.406: J8.1 LEDS.9
N$25
  Top 2: 140,-1 161,-1 161,20
N$26
  Top 2: 20,101 -1,101 -1,80
N$27
  Top 2: 161,80 161,101 140,101
N$28
  Bottom 2: 20,-1 -1,-1 -1,20
N$29
  Bottom 2: 140,-1 161,-1 161,20
N$30
  Bottom 2: 20,101 -1,101 -1,80
N$31
  Bottom 0.406: SWITCHES.2 R4.1
N$32
  Bottom 0.406: IC1.10 20.35,53.05 J14.1
N$33
  Bottom 0.406: IC1.11 21.15,55.3 J13.1
N$34
  Bottom 0.406: IC1.2 17.02,44.96 16.76,44.7 16.76,43.18 17.27,42.67 17.27,36.83 14.99,34.54 3.81,34.54 3.81,54.36 LEDS.5
N$35
  Bottom 0.406: IC1.1 18.29,44.19 18.29,36.07 15.75,33.53 2.79,33.53 2.79,55.88 LEDS.3
N$36
  Bottom 0.406: SWITCHES.6 R14.1
N$37
  Bottom 0.406: IC2.1 39.7,85.6 24.38,85.6 19.05,80.26 12.45,80.26 11.18,78.99 IC6.1
N$38
  Bottom 0.406: IC2.2 40.64,81.28 37.85,84.07 24.89,84.07 IC6.4
N$39
  Bottom 2: 161,80 161,101 140,101
N$40
  Bottom 0.406: IC1.32 19.3,42.7 19.3,35.31 16.51,32.51 1.78,32.51 1.78,57.4 LEDS.1
N$41
  Bottom 0.406: LEDS.4 R6.1
N$42
  Bottom 0.406: IC4.16 69.98,47.37 70.52,47.92 R15.2 70.36,49.19 C15.1
N$43
  Bottom 0.406: Q2.G 64.01,81.28 68.83,86.11 73.91,86.11 75.69,84.33 75.69,79.76 74.17,78.23 71.37,78.23 69.34,76.2 Q5.G 68.07,54.86 74.68,54.86 74.68,51.56 72.73,51.56 R16.2 72.64,49.44 R15.1
N$44
  Bottom 0.406: LEDS.6 R12.1
N$45
  Bottom 0.406: IC4.15 68.71,47.37 68.16,47.92 R17.2 68.33,49.19 C16.1
N$46
  Bottom 0.406: Q4.G 73.66,18.54 75.69,20.57 75.69,24.64 73.66,26.67 67.82,26.67 64.77,23.62 Q3.G 59.18,48.51 60.11,49.44 66.04,49.44 | 66.04,49.44 R18.2 | 66.04,49.44 R17.1
N$47
  Bottom 0.406: SWITCHES.8 R20.1
N$48
  Bottom 0.406: IC2.8 47.75,73.66 49.02,72.39 Q6.2 C19.1
N$49
  Bottom 0.406: IC2.7 47.75,74.93 49.02,76.2 Q6.1 C20.1
N$50
  Bottom 0.406: IC6.7 13.72,84.33 12.95,83.57 5.28,83.57 X1.2
N$51
  Bottom 0.406: IC6.6 16.26,84.84 13.46,82.04 10.92,82.04 8.89,80.01 5.28,80.01 X1.3
N$52
  Bottom 0.406: LEDS.2 R5.1
N$53
  Bottom 0.406: LEDS.8 R19.1
N$54
  Bottom 0.406: LEDS.10 R21.1
N$55
  Bottom 0.406: SWITCHES.1 33.02,41.66 25.15,41.66 IC1.25
N$56
  Bottom 0.406: SWITCHES.3 31.5,40.64 24.35,40.64 IC1.26
N$57
  Bottom 0.406: J3.1 55.37,15.24 53.09,17.53 | 53.09,17.53 53.09,39.12 R10.1 | D2.A 53.09,17.53
N$58
  Bottom 0.406: R7.2 SV1.4 26.67,97.28 42.67,97.28 C17.-
N$59
  Bottom 0.406: SWITCHES.5 29.97,39.62 23.55,39.62 IC1.27
N$60
  Bottom 0.406: SWITCHES.7 28.45,38.61 22.75,38.61 IC1.28
N$61
  Bottom 0.406: R22.1 5.28,76.51 X1.4
N$62
  Bottom 0.406: R23.2 18.46,92.46 T2.1
N$63
  Bottom 0.406: SWITCHES.10 46.74,30.73 | 46.74,30.73 D3.C | 46.74,30.73 D2.C
N$64
  Bottom 0.406: J6.1 68.83,89.41 65.02,85.6 57.66,85.6 52.83,80.77 52.83,41.4 49.78,41.4 | R11.1 49.78,41.4 | 49.78,41.4 D3.A
N$65
  Bottom 0.406: IC4.1 74.42,39.85 J10.2
N$66
  Bottom 0.406: IC1.24 28.16,42.67 42.67,42.67 42.67,39.12 R10.2 R8.1
N$67
  Bottom 0.406: IC4.2 68.71,42.93 71.88,42.93 71.88,46.48 J11.2
N$68
  Bottom 0.406: ISP.1 44.45,66.8 42.67,68.58 J12.1
N$69
  Bottom 0.406: J11.1 49.02,52.83 J13.2
N$70
  Bottom 0.406: J14.2 47.24,51.56 47.24,45.97 J10.1
N$71
  Bottom 0.406: IC1.15 24.35,55.59 29.97,61.21 29.97,65.53 30.99,66.55 30.99,69.6 J15.1
N$72
  Bottom 0.406: J16.2 IC2.12
N$73
  Bottom 0.406: J17.2 23.96,90.93 R23.1
N$74
  Bottom 0.406: IC1.29 21.95,37.12 C13.2 22.49,33.81 23.79,32.51 J5.2 26.07,32.51 R1.1
N$75
  Bottom 0.406: J4.1 17.27,30.99 J5.1
N$76
  Bottom 0.406: J7.1 47.5,57.66 J8.2
N$77
  Bottom 0.406: C26.2 107.95,17.53 109.35,17.53 IC8.1
N$78
  Bottom 0.406: C27.2 104.65,17.53 105.54,17.53 IC8.4
N$79
  Bottom 0.406: C26.1 107.44,19.56 106.81,19.56 IC8.3
N$80
  Bottom 0.406: C27.1 104.65,19.56 104.27,19.56 IC8.5
N$81
  Bottom 0.406: IC8.2 108.08,23.75 108.71,24.38 111.25,24.38 C28.1
N$82
  Bottom 0.406: C29.1 101.35,17.53 103,17.53 IC8.6
N$83
  Bottom 0.406: IC8.13 105.54,26.29 104.9,25.65 RS1.3
N$84
  Bottom 0.406: 101.73,22.48 IC8.7 101.73,23.75 101.09,24.38 96.27,24.38 94.74,22.86 93.73,22.86
  Bottom 0.61: RS1.2 93.73,22.86
N$85
  Bottom 0.406: IC7.7 92.93,48.99 90.93,46.99 | 90.93,46.99 Q7.2 | C31.2 89.41,48.51 90.93,46.99
N$86
  Bottom 0.406: IC7.8 93.21,49.79 90.93,52.07 Q7.1 90.93,51.82 89.66,50.55 C32.2
N$87
  Bottom 0.406: C35.2 112.52,47.5 112.41,47.39 IC7.20
N$88
  Bottom 0.406: IC7.21 109.87,46.59 111.25,45.21 R25.1
N$89
  Bottom 0.406: IC7.18 110.2,48.99 111,49.78 R26.1 112.52,49.78
N$90
  Bottom 0.406: +INTERN1.1 J22.2
  Bottom 1.676: Q9.S +INTERN1.1
N$91
  Bottom 0.406: +EXTERN1.1 J21.2
  Bottom 1.676: Q8.S +EXTERN1.1
N$100
  Bottom 0.406: IC9.16 151.51,47.37 152.06,47.92 R29.2 151.89,49.19 C36.1
N$101
  Bottom 0.406: Q10.G 145.54,81.28 150.37,86.11 155.45,86.11 157.23,84.33 157.23,79.76 155.7,78.23 152.91,78.23 150.88,76.2 Q9.G 149.61,54.86 156.21,54.86 156.21,51.56 154.27,51.56 R30.2 154.18,49.44 R29.1
N$102
  Bottom 0.406: IC9.15 150.24,47.37 149.69,47.92 R31.2 149.86,49.19 C37.1
N$103
  Bottom 0.406: Q8.G 155.19,18.54 157.23,20.57 157.23,24.64 155.19,26.67 149.35,26.67 146.3,23.62 Q11.G 140.72,48.51 141.64,49.44 147.57,49.44 | 147.57,49.44 R32.2 | 147.57,49.44 R31.1
N$104
  Bottom 0.406: IC7.23 109.7,44.99 111,43.69 R35.1 R37.2
N$105
  Bottom 0.406: J36.2 141.48,57.91 141.22,57.91
  Bottom 1.676: Q11.S 136.65,18.54 136.65,57.91 | 136.65,57.91 136.65,76.2 Q10.S | 136.65,57.91 141.22,57.91 AKKU+1.1
N$106
  Bottom 0.406: IC7.14 105.09,57.33 109.22,61.47 J32.1
N$107
  Bottom 0.406: IC11.1 121.23,85.6 105.92,85.6 100.58,80.26 93.98,80.26 92.71,78.99 IC12.1
N$108
  Bottom 0.406: IC11.2 122.17,81.28 119.38,84.07 106.43,84.07 IC12.4
N$109
  Bottom 0.406: IC11.8 129.29,73.66 130.56,72.39 Q12.2 C40.1
N$110
  Bottom 0.406: IC11.7 129.29,74.93 130.56,76.2 Q12.1 C41.1
N$111
  Bottom 0.406: IC12.7 95.25,84.33 94.49,83.57 86.81,83.57 X2.2
N$112
  Bottom 0.406: IC12.6 97.79,84.84 95,82.04 92.46,82.04 90.42,80.01 86.81,80.01 X2.3
N$113
  Bottom 0.406: IC7.10 101.89,53.05 J29.1
N$114
  Bottom 0.406: IC7.11 102.69,55.3 J28.1
N$115
  Bottom 0.406: IC7.2 98.55,44.96 98.3,44.7 98.3,43.18 98.81,42.67 98.81,36.83 96.52,34.54 85.34,34.54 85.34,54.36 LEDS1.5
N$116
  Bottom 0.406: IC7.1 99.82,44.19 99.82,36.07 97.28,33.53 84.33,33.53 84.33,55.88 LEDS1.3
N$117
  Bottom 0.406: IC7.32 100.84,42.7 100.84,35.31 98.04,32.51 83.31,32.51 83.31,57.4 LEDS1.1
N$118
  Bottom 0.406: LEDS1.4 R28.1
N$119
  Bottom 0.406: LEDS1.2 R27.1
N$120
  Bottom 0.406: LEDS1.6 R38.1
N$121
  Bottom 0.406: LEDS1.8 R39.1
N$122
  Bottom 0.406: LEDS1.10 R40.1
N$123
  Bottom 0.406: SWITCHES1.4 R42.1
N$124
  Bottom 0.406: SWITCHES1.2 R41.1
N$125
  Bottom 0.406: SWITCHES1.6 R43.1
N$126
  Bottom 0.406: SWITCHES1.8 R44.1
N$127
  Bottom 0.406: SWITCHES1.1 114.55,41.66 106.69,41.66 IC7.25
N$128
  Bottom 0.406: SWITCHES1.3 113.03,40.64 105.89,40.64 IC7.26
N$129
  Bottom 0.406: SWITCHES1.5 111.51,39.62 105.09,39.62 IC7.27
N$130
  Bottom 0.406: SWITCHES1.7 109.98,38.61 104.29,38.61 IC7.28
N$131
  Bottom 0.406: R45.1 86.81,76.51 X2.4
N$132
  Bottom 0.406: R46.2 99.99,92.46 T1.1
N$133
  Bottom 0.406: R33.2 SV2.4 108.2,97.28 124.21,97.28 C38.-
N$134
  Bottom 1.676: Q10.D Q9.D
N$135
  Bottom 1.676: Q11.D Q8.D
N$136
  Bottom 0.406: T1.3 R33.1
N$137
  Bottom 0.406: SWITCHES1.10 128.27,30.73 | 128.27,30.73 D6.C | 128.27,30.73 D5.C
N$138
  Bottom 0.406: J21.1 136.91,15.24 134.62,17.53 | 134.62,17.53 134.62,39.12 R36.1 | D5.A 134.62,17.53
N$139
  Bottom 0.406: J22.1 150.37,89.41 146.56,85.6 139.19,85.6 134.37,80.77 134.37,41.4 131.32,41.4 | R37.1 131.32,41.4 | 131.32,41.4 D6.A
N$140
  Bottom 0.406: IC7.24 109.7,42.67 124.21,42.67 124.21,39.12 R36.2 R34.1
N$141
  Bottom 0.406: J23.1 LEDS1.9
N$142
  Bottom 0.406: IC9.1 155.96,39.85 J25.2
N$143
  Bottom 0.406: IC9.2 150.24,42.93 153.42,42.93 153.42,46.48 J26.2
N$144
  Bottom 0.406: J26.1 130.56,52.83 J28.2
N$145
  Bottom 0.406: J29.2 128.78,51.56 128.78,45.97 J25.1
N$146
  Bottom 0.406: ISP1.1 125.98,66.8 124.21,68.58 J27.1
N$147
  Bottom 0.406: IC7.15 105.89,55.59 111.51,61.21 111.51,65.53 112.52,66.55 112.52,69.6 J30.1
N$148
  Bottom 0.406: J31.2 IC11.12
N$149
  Bottom 0.406: J32.2 105.5,90.93 R46.1
N$150
  Bottom 0.406: IC7.29 103.49,37.12 C34.2 104.03,33.81 105.32,32.51 J35.2 107.61,32.51 R24.1
N$151
  Bottom 0.406: J34.1 98.81,30.99 J35.1
N$152
  Bottom 0.406: J36.1 129.03,57.66 J23.2
RST
  Bottom 0.406: ISP.5 39.37,77.47 35.56,81.28 IC2.17 26.16,81.28 22.86,77.98 22.86,77.22 21.08,75.44 21.08,73.66 21.59,73.15 21.59,61.47 17.53,57.4 17.53,56.64 16.51,55.63 16.51,52.32 J4.2
RST1
  Bottom 0.406: ISP1.5 120.9,77.47 117.09,81.28 IC11.17 107.7,81.28 104.39,77.98 104.39,77.22 102.62,75.44 102.62,73.66 103.12,73.15 103.12,61.47 99.06,57.4 99.06,56.64 98.04,55.63 98.04,52.32 J34.2
RXD
  Bottom 0.406: IC1.30 21.15,31.93 22.73,30.35 IC3.12
RXD1
  Bottom 0.406: IC7.30 102.69,31.93 104.27,30.35 IC8.12
SCK
  Bottom 0.406: IC1.17 26.64,53.06 32.51,58.93 32.51,64.01 33.27,64.77 35.56,64.77 ISP.7 33.53,69.34 33.53,70.61 36.07,73.15 36.07,75.44 35.31,76.2 IC2.13
SCK1
  Bottom 0.406: IC7.17 108.18,53.06 114.05,58.93 114.05,64.01 114.81,64.77 117.09,64.77 ISP1.7 115.06,69.34 115.06,70.61 117.6,73.15 117.6,75.44 116.84,76.2 IC11.13
SS
  Bottom 0.406: IC1.12 21.95,58.02 25.15,61.21 25.15,78.49 26.67,80.01 IC2.16
SS1
  Bottom 0.406: IC7.12 103.49,58.02 106.68,61.21 106.68,78.49 108.2,80.01 IC11.16
TXD
  Bottom 0.406: IC1.31 20.33,42.67 20.32,42.67 20.32,28.85 IC3.10
TXD1
  Bottom 0.406: IC7.31 101.86,42.67 101.85,42.67 101.85,28.85 IC8.10

## Text on the board
Bottom: INTERN | INTERN | ISP | ISP | OUTPUT | OUTPUT | LEDS | LEDS | PowerSwitch005 | CN2011 | SW | PowerSwitch005 | CN2011 | SW | EXTERN | EXTERN